# EAGLE board connector_board_2 (EAGLE 5.09)
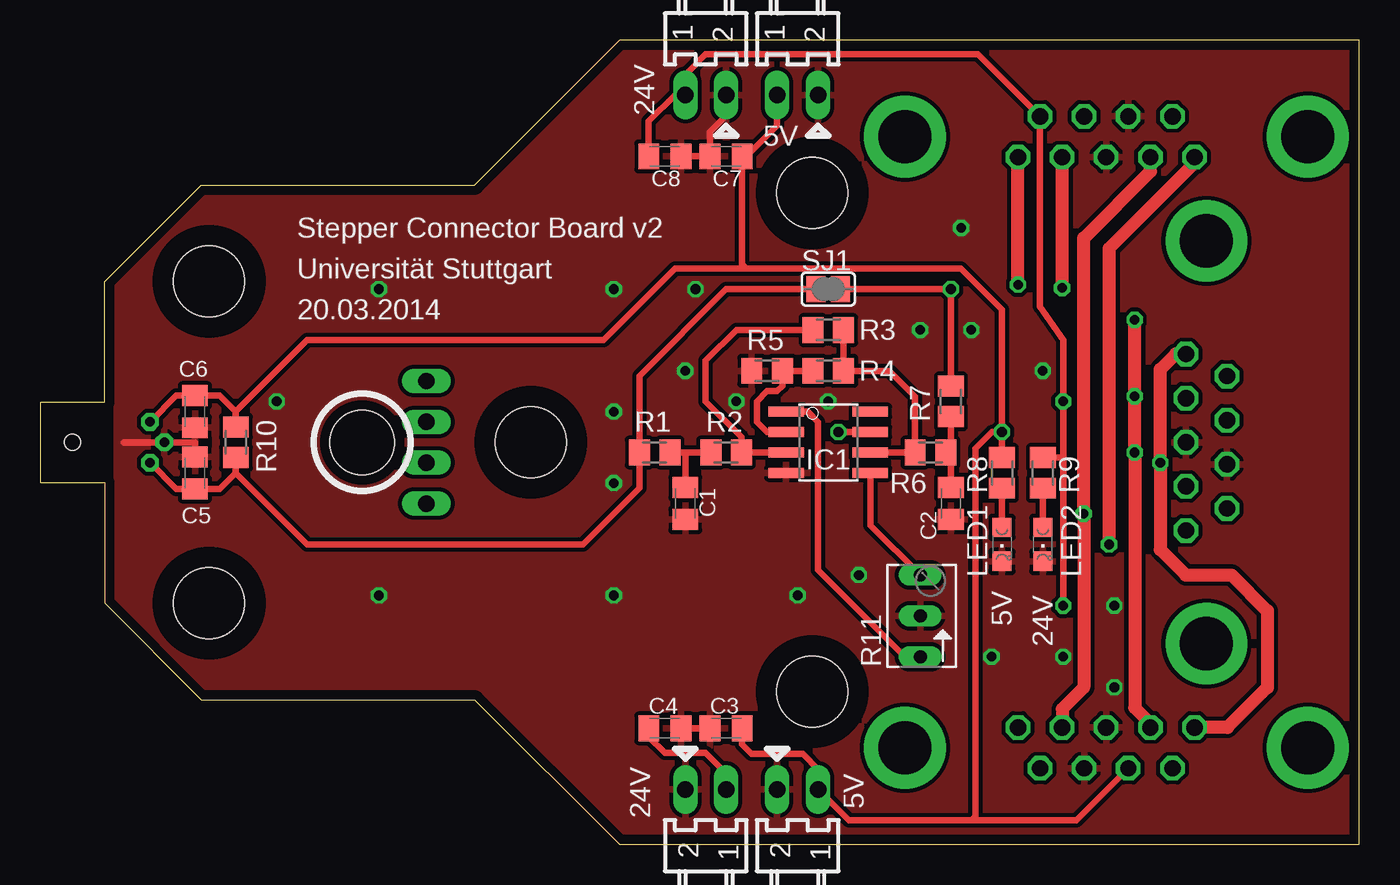
[diagram p0: board, top side]
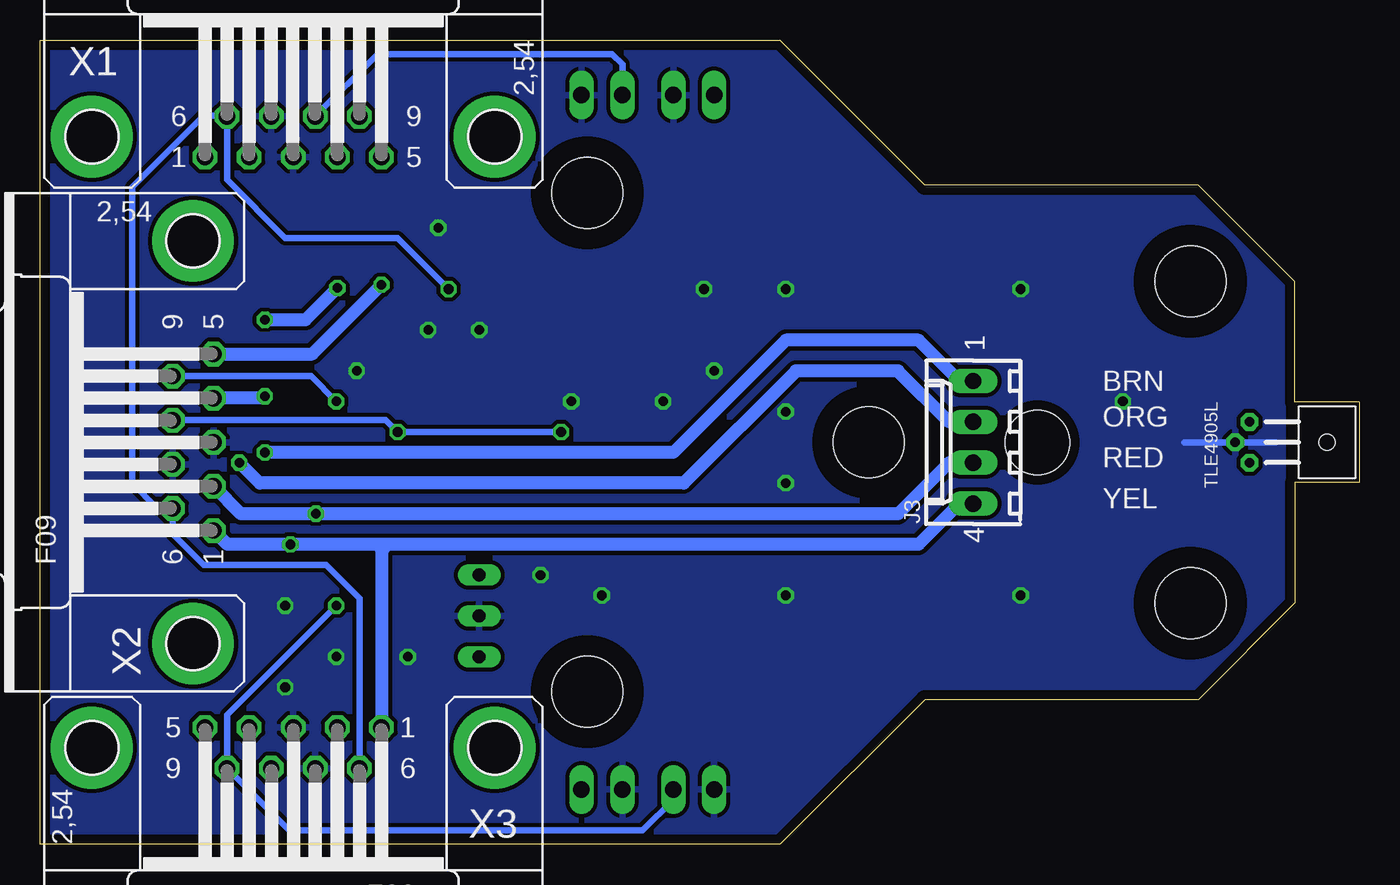
[diagram p1: board, bottom side, seen from below]

Size 82 x 50 mm. Coordinates in mm from the lower left corner, seen from the top.
Outline: 36,0 82,0 82,50 36,50 27,41 10,41 4,35 4,27.5 0,27.5 0,22.5 4,22.5 4,15 10,9 27,9 36,0
Copper layers (1*16): Top 0.035mm / dielectric 1.5mm / Bottom 0.035mm
Design rules "default *": minimum track width 12mil, minimum drill 0.3mm, track to track 10mil, track to pad 10mil, pad to pad 10mil, via to via 10mil, smd to smd 8mil, copper to edge 24mil, drill to drill 8mil, minimum pad ring 10mil, minimum via ring 8mil, stop-mask expansion 4mil, vias tented up to drill 0mil, thermal gap 10mil
Holes 4.4 mm at 10.5,15 10.5,35 30.5,25 48,40.5 48,9.5
Holes 4 mm at 20,25
tRestrict: area -0.5,21.2 to 4.5,28.8; area 44.5,6 to 51.5,13; area 44.5,37 to 51.5,44; area 27,21.5 to 34,28.5; area 7,31.5 to 14,38.5; area 7,11.5 to 14,18.5
bRestrict: area -0.5,21.2 to 4.5,28.8; area 7,11.5 to 14,18.5; area 7,31.5 to 14,38.5; area 27,21.5 to 34,28.5; area 44.5,6 to 51.5,13; area 44.5,37 to 51.5,44

## Footprints (pad centres in the part's own frame; a part is rotated, then mirrored left to right if it is on the bottom)
C0805K = smd 1.3 x 1.6: 1 -1,0; 2 1,0
SO08 = smd 0.61 x 2.21: 1 -1.905,-2.616; 2 -0.635,-2.616; 3 0.635,-2.616; 4 1.905,-2.616; 5 1.905,2.616; 6 0.635,2.616; 7 -0.635,2.616; 8 -1.905,2.616
7395-02 = drill 1.016 long: 1 1.27,0; 2 -1.27,0
6410-04 = drill 1.016 long: 1 3.81,0; 2 1.27,0; 3 -1.27,0; 4 -3.81,0
CHIPLED_0805 = smd 1.2 x 1.2: A 0,-1.05; C 0,1.05
M0805 = smd 1.3 x 1.6: 1 -0.95,0; 2 0.95,0
B64Y = drill 0.813 long: A 2.54,0; E -2.54,0; S 0,0
SJ = smd 1.168 x 1.6: 1 -0.762,0; 2 0.762,0
TLE4905L = drill 0.6 octagon: P$1 -4.826,1.27; P$2 -5.715,0; P$3 -4.826,-1.27 | hole 1: 0,0
F09HP = drill 1.016 octagon: 1 -5.486,-1.27; 2 -2.743,-1.27; 3 0,-1.27; 4 2.743,-1.27; 5 5.486,-1.27; 6 -4.115,1.27; 7 -1.372,1.27; 8 1.372,1.27; 9 4.115,1.27 | drill 3.302 pad 5.08 round: G1 -12.522,0; G2 12.522,0

## Placement (x,y rotation side)
C1  [C0805K]  40.1,21.19 270 top
C2  [C0805K]  56.61,21.19 270 top
C3  [C0805K]  42.64,7.22 180 top
C4  [C0805K]  38.83,7.22 0 top
C5  4.7nF  [C0805K]  9.62,23.09 90 top
C6  4.7nF  [C0805K]  9.62,26.91 270 top
C7  [C0805K]  42.64,42.78 180 top
C8  [C0805K]  38.83,42.78 0 top
IC1  OPA241U  [SO08]  48.99,25 270 top
J1  PWR5V  [7395-02]  47.09,3.41 0 top
J2  PWR24V  [7395-02]  41.37,3.41 0 top
J3  STEPPER  [6410-04]  24,25 90 bottom
J4  PWR5V  [7395-02]  47.09,46.59 180 top
J5  PWR24V  [7395-02]  41.37,46.59 180 top
LED1  LED 5V  [CHIPLED_0805]  59.78,18.65 180 top
LED2  LED 24V  [CHIPLED_0805]  62.33,18.65 180 top
R1  [M0805]  38.2,24.36 0 top
R2  [M0805]  42.64,24.36 0 top
R3  [M0805]  48.99,31.98 0 top
R4  [M0805]  48.99,29.45 0 top
R5  [M0805]  45.18,29.45 0 top
R6  [M0805]  55.34,24.36 0 top
R7  [M0805]  56.61,27.54 90 top
R8  1k  [M0805]  59.78,23.09 90 top
R9  2k7  [M0805]  62.33,23.09 90 top
R10  1k2  [M0805]  12.16,25 90 top
R11  [B64Y]  54.7,14.21 90 top
SJ1  [SJ]  48.99,34.52 0 top
U$1  TLE4905L  [TLE4905L]  2,25 0 bottom
X1  [F09HP]  66.27,44 0 bottom
X2  [F09HP]  72.5,25 90 bottom
X3  [F09HP]  66.27,6 180 bottom

## Library data of the parts
C1-C8 R1-R10 = rcl
IC1 = burr-brown
J1-J5 = con-molex
LED1 LED2 = led
R11 = pot
SJ1 = jumper
U$1 = Kim
X1-X3 = con-subd

## Nets
1A: J3.1 X1.4 X2.4 X3.4
1B: J3.2 X1.5 X2.5 X3.5
2A: J3.3 X1.2 X2.2 X3.2
2B: J3.4 X1.1 X2.1 X3.1
+5V: C3.1 C6.1 C7.1 IC1.7 J1.1 J4.1 R8.2 R10.2 U$1.P$1 X1.8 X2.8 X3.8
+24V: C4.1 C8.1 J2.1 J5.1 R9.2 X1.9 X2.9 X3.9
GND: C1.2 C2.2 C3.2 C4.2 C5.2 C6.2 C7.2 C8.2 IC1.4 J1.2 J2.2 J4.2 J5.2 LED1.C LED2.C R5.1 R11.S U$1.P$2 X1.3 X1.7 X2.3 X2.7 X3.3 X3.7
N$1: IC1.3 R2.2 R3.1
N$2: C1.1 R1.2 R2.1
N$3: IC1.6 R3.2 R4.2 R6.1
N$4: IC1.2 R4.1 R5.2
N$5: C2.1 R6.2 R7.1
N$6: C5.1 R1.1 R10.1 SJ1.1 U$1.P$3
N$7: IC1.5 R11.A
N$8: LED1.A R8.1
N$9: LED2.A R9.1
N$10: IC1.1 R11.E
SENS: R7.2 SJ1.2 X1.6 X2.6 X3.6

## Tracks (layer width: path | path; a pad name or v marks a point on that pad's centre or on a via)
1A  (via drill 0.6, 0.6 pad 0.3)
  Top 0.813: v68.04,32.62 v68.04,27.86 v68.04,24.36 68.04,8.49 69.01,7.52 X3.4 | v63.53,34.59 X1.4
  Bottom 0.813: J3.1 24.86,28.81 27.4,31.35 35.66,31.35 42.64,24.36 v68.04,24.36 | v68.04,32.62 65.5,32.62 v63.53,34.59 | X2.4 68.15,27.74 v68.04,27.86
1B  (via drill 0.6, 0.6 pad 0.3)
  Top 0.813: v60.78,34.8 X1.5 | X2.5 70.58,30.49 69.63,29.53 v69.63,23.73 69.63,18.33 71.22,16.74 74.07,16.74 76.3,14.52 76.3,9.76 73.81,7.27 X3.5
  Bottom 0.813: J3.2 25.5,26.27 28.67,29.45 35.02,29.45 42.01,22.46 68.36,22.46 v69.63,23.73 | X2.5 65.09,30.49 v60.78,34.8
2A  (via drill 0.6)
  Top 0.813: X3.2 63.53,8.42 64.87,9.76 v64.87,20.55 64.87,37.7 69.01,41.85 X1.2
  Bottom 0.813: J3.3 25.5,23.73 28.67,20.55 v64.87,20.55 69.53,20.55 X2.2
2B  (via drill 0.6)
  Top 0.813: X1.1 71.76,42.37 66.45,37.06 v66.45,18.65
  Bottom 0.813: J3.4 24.86,21.19 27.4,18.65 60.42,18.65 | 60.42,18.65 v66.45,18.65 70.37,18.65 X2.1 | X3.1 60.78,18.29 60.42,18.65
+5V  (via drill 0.6)
  Top 0.406: v49.62,25.64 IC1.7 | v59.78,25.64 R8.2 | J4.1 45.81,44.69 43.91,42.78 C7.1 43.64,36.06 43.91,35.8 | v59.78,25.64 59.15,25.64 58.13,24.62 58.13,1.76 57.88,1.5 | 57.88,1.5 50.26,1.5 J1.1 48.35,4.68 47.4,5.63 44.23,5.63 43.64,6.22 C3.1 | U$1.P$1 8.46,27.91 C6.1 11.16,27.91 12.16,26.91 | 12.16,26.91 R10.2 | 12.16,26.91 16.61,31.35 35.02,31.35 39.47,35.8 43.91,35.8 | v59.78,25.64 59.78,33.26 57.24,35.8 43.91,35.8 | 57.88,1.5 64.42,1.5 X3.8
  Bottom 0.406: v49.62,25.64 v59.78,25.64 60.52,26.37 X2.8 | J4.1 45.81,48.5 46.45,49.13 61.04,49.13 X1.8
+24V  (via drill 0.6 pad 0.3)
  Top 0.406: C8.1 37.83,44.95 39.47,46.59 J5.1 40.1,47.86 41.37,49.13 58.3,49.13 X1.9 62.16,33.42 63.59,31.35 v63.59,27.54 63.59,24.05 | J2.1 42.64,4.43 41.37,5.7 38.83,5.7 37.83,6.7 C4.1 | 63.59,24.05 R9.2 | v63.59,14.84 63.59,24.05
  Bottom 0.406: J2.1 42.64,2.77 44.55,0.87 66.53,0.87 X3.9 70.39,8.05 v63.59,14.84 | X2.9 65.17,29.12 v63.59,27.54
GND  (via drill 0.6)
  Top 0.406: C8.2 C7.2 41.64,44.32 42.64,45.32 J5.2 | C3.2 C4.2 40.1,6.95 | C5.2 9.62,25 U$1.P$2 7.08,25 5.17,25
  Bottom 0.406: 10.89,25 U$1.P$2 5.17,25
  other vias: 21.05,34.52 21.05,15.47 48.99,27.54 40.1,29.45 54.7,31.98 57.24,38.34 50.9,16.74 47.09,15.47 59.15,11.66 35.66,34.52 35.66,15.47 14.7,27.54 40.73,34.52 35.66,26.91 35.66,22.46 43.27,27.54 57.88,31.98 62.33,29.45 63.59,11.66 66.77,14.84 66.77,9.76
  pour Top: 83.28,51.67 -1.81,51.67 -1.81,-1.67 83.28,-1.67
  pour Bottom: 83.28,51.67 -1.81,51.67 -1.81,-1.67 83.28,-1.67
N$1
  Top 0.406: IC1.3 R2.2 43.59,25.32 41.37,27.54 41.37,30.08 43.27,31.98 R3.1
N$2
  Top 0.406: 40.1,24.36 R1.2 | 40.1,24.36 R2.1 | C1.1 40.1,24.36
N$3
  Top 0.406: IC1.6 R6.1 54.39,27.86 52.8,29.45 R4.2 R3.2
N$4
  Top 0.406: R4.1 R5.2 46.13,28.49 45.81,28.18 45.18,28.18 44.55,27.54 44.55,26.27 45.18,25.64 IC1.2
N$5
  Top 0.406: C2.1 56.61,24.05 R6.2 56.61,24.68 R7.1
N$6
  Top 0.406: U$1.P$3 8.46,22.09 C5.1 11.16,22.09 12.16,23.09 | 12.16,23.09 R10.1 | 12.16,23.09 16.61,18.65 33.75,18.65 37.24,22.14 R1.1 37.24,29.13 42.64,34.52 SJ1.1
N$7
  Top 0.406: IC1.5 51.61,19.84 R11.A
N$8
  Top 0.406: LED1.A R8.1
N$9
  Top 0.406: LED2.A R9.1
N$10
  Top 0.406: IC1.1 47.72,26.91 48.35,26.27 48.35,17.06 53.75,11.66 R11.E
SENS  (via drill 0.6 pad 0.3)
  Top 0.406: SJ1.2 v56.61,34.52 R7.2
  Bottom 0.406: X3.6 62.16,15.3 64.23,17.38 71.85,17.38 73.77,19.3 X2.6 74.72,20.88 76.3,22.46 76.3,40.88 71.85,45.32 70.44,45.32 X1.6 70.39,41.31 66.77,37.7 59.78,37.7 v56.61,34.52

## Text on the board
tPlace: 24V | 5V | Stepper Connector Board v2 | Universität Stuttgart | 20.03.2014 | 5V | 24V | 24V | 5V
bPlace: TLE4905L | BRN | ORG | RED | YEL